# Altium PCB V_1.PcbDoc
Units mm, origin at the board's own origin, x right, y up, seen from the top; angles counter-clockwise.
Board outline 152.4 x 101.6 mm, 2 copper layers (Top Layer, Bottom Layer); 6 components, 9 nets, 74 pads, 13 vias.
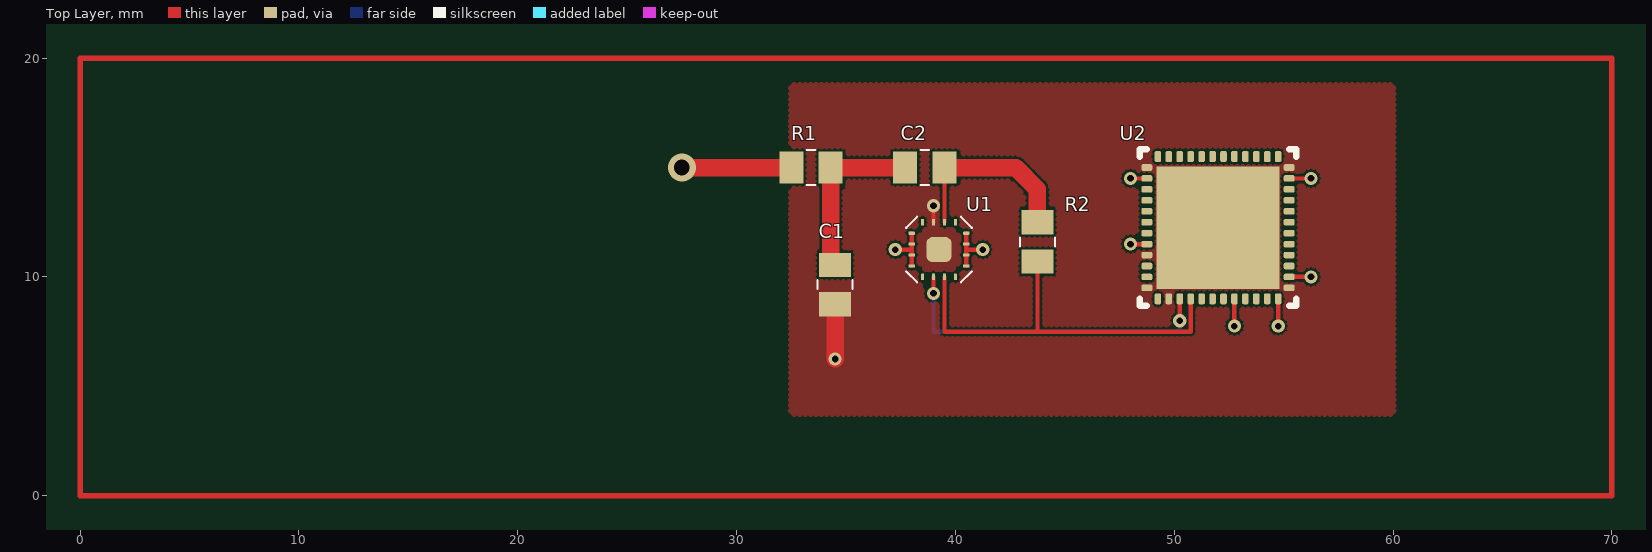
[diagram p0: Top Layer view]
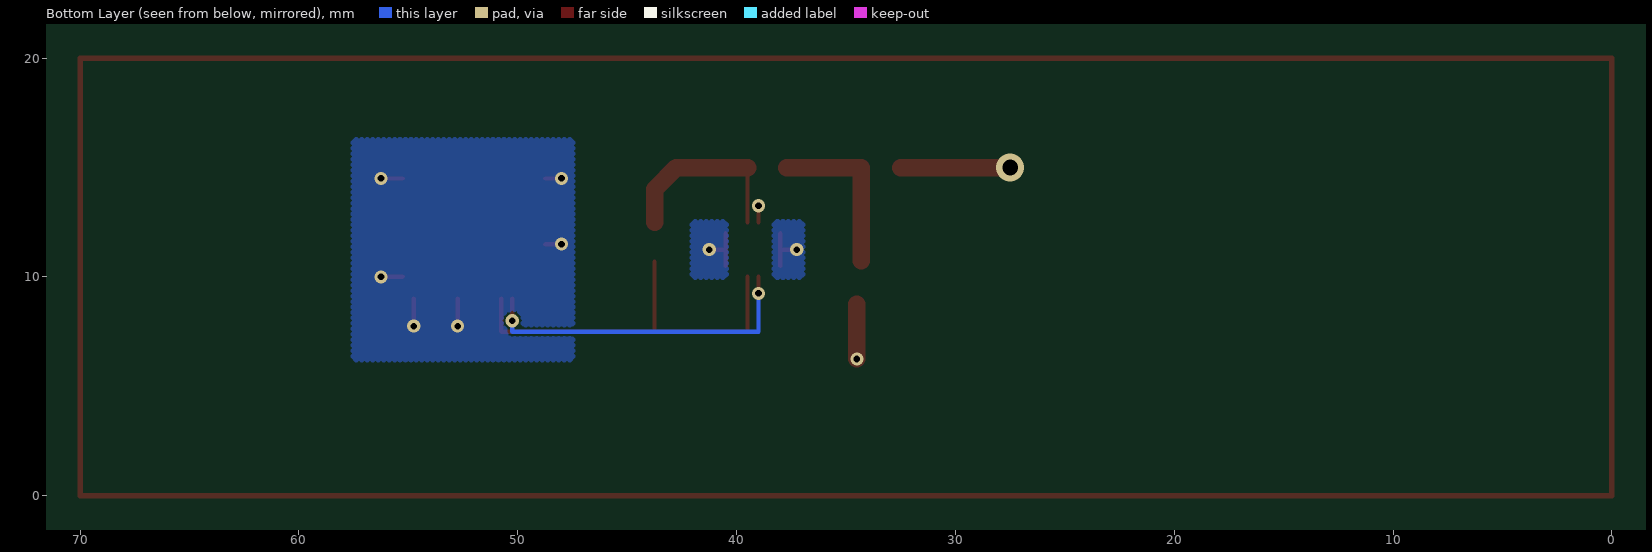
[diagram p1: Bottom Layer view, seen from below]

## Layer stack, top to bottom
Top Layer: signal copper 0.0356
Dielectric: dielectric 0.32, FR-4, Dk 4.8
Bottom Layer: signal copper 0.0356

## Board outline
-13.97,-53.975 138.43,-53.975 138.43,47.625 -13.97,47.625

## Design rules (kind name [scope] priority, off if disabled: settings)
Clearance [All] p1: gap=0.1
HoleToHoleClearance [All] p1: gap=0.2 allowstackedmicrovias=TRUE
MinimumSolderMaskSliver [All] p1: minsoldermaskwidth=0.05
PlaneClearance [All] p1: clearance=0.1
PlaneConnect [All] p1: planeconnectstyle=Direct reliefexpansion=0.508 reliefentries=4 reliefconductorwidth=0.254 reliefairgap=0.254
PolygonConnect [All] p1: connectstyle=Direct reliefconductorwidth=0.254 reliefentries=4 polygonreliefangle="90 Angle" airgapwidth=0.254
RoutingVias [All] p1: holewidth=0.3 width=0.6 viastyle="Through Hole" minholewidth=0.1 minwidth=0.1 maxholewidth=0.711 maxwidth=1.27
SilkToSilkClearance [All] p1: silktosilkclearance=0.2
SilkscreenOverComponentPads [All] p1: minsilkscreentomaskgap=0.1
SolderMaskExpansion [All] p1: expansion=0.05
Width [All] p1: maxlimit=1 minlimit=0.1 preferedwidth=0.5
22 further rules are at their usual default settings.

## Components (designator, comment, footprint, x,y, rotation, side; value= is the part's Value field where it differs from the comment)
C1 "2p2" CAP0805 34.5,8.75 r90 top
C2 "2p2" CAP0805 39.5,15 r180 top
R1 "6K8" RES0805 32.5,15 r0 top
R2 "2K2" RES0805 43.75,12.5 r270 top
U1 "ADA4932" ADA4932 40,12.5 r270 top
U2 "ADS61B" ADS61B49 48.75,15 r0 top

## Footprints (in the part's own frame and the unit in brackets; to place one, negate y for a bottom-side part, rotate by r counter-clockwise, add the part's x,y. Pads: shape width x height; smd on the part's side, far side on the other; paste and mask are expansions set on the pad)
ADA4932 [mm]
  rrect50% 0.3x0.15 smd: 1(0,0) 2(0,-0.5) 3(0,-1) 4(0,-1.5) 9(2.5,-1.5) 10(2.5,-1) 11(2.5,-0.5) 12(2.5,0)
  rrect50% 0.15x0.3 smd: 5(0.5,-2) 6(1,-2) 7(1.5,-2) 8(2,-2) 13(2,0.5) 14(1.5,0.5) 15(1,0.5) 16(0.5,0.5)
  rrect50% 1.15x1.15 smd: 17(1.25,-0.75)
  silkscreen extent -0.25,-2.25 2.75,0.75
ADS61B49 [mm]
  rrect50% 0.5x0.3 smd: 1(0,0) 2(0,-0.5) 3(0,-1) 4(0,-1.5) 5(0,-2) 6(0,-2.5) 7(0,-3) 8(0,-3.5) 9(0,-4) 10(0,-4.5) 11(0,-5) 12(0,-5.5) 25(6.5,-5.5) 26(6.5,-5) 27(6.5,-4.5) 28(6.5,-4) 29(6.5,-3.5) 30(6.5,-3) 31(6.5,-2.5) 32(6.5,-2) 33(6.5,-1.5) 34(6.5,-1) 35(6.5,-0.5) 36(6.5,0)
  rrect50% 0.3x0.5 smd: 13(0.5,-6) 14(1,-6) 15(1.5,-6) 16(2,-6) 17(2.5,-6) 18(3,-6) 19(3.5,-6) 20(4,-6) 21(4.5,-6) 22(5,-6) 23(5.5,-6) 24(6,-6) 37(6,0.5) 38(5.5,0.5) 39(5,0.5) 40(4.5,0.5) 41(4,0.5) 42(3.5,0.5) 43(3,0.5) 44(2.5,0.5) 45(2,0.5) 46(1.5,0.5) 47(1,0.5) 48(0.5,0.5)
  rect 5.6x5.6 smd: 49(3.25,-2.75)
  silkscreen extent -0.32,-6.32 6.83,0.82
CAP0805 [mm]
  rect 1.1x1.45 smd: 1(0,0) 2(1.8,0)
  silkscreen extent 0.7,-0.8 1.1,0.8
RES0805 [mm]
  rect 1.1x1.45 smd: 1(0,0) 2(1.8,0)
  silkscreen extent 0.7,-0.8 1.1,0.8

## Part data
C1 C2: library part Cap
R1 R2: library part Res
U2: library part ADS61B49

## Via types
v1: diameter 0.6, hole 0.3, Top Layer to Bottom Layer, 12 vias
v2: diameter 1.27, hole 0.711, Top Layer to Bottom Layer, 1 vias

## Nets (pads, with @x,y where several pads share a name; then routed paths per layer and width w, separated by ;. In a path a pad name is that pad's centre, name@x,y a point inside that pad or via, vN(x,y) a via of type N, cw(c..) or ccw(c..) an arc to the next point about the centre after c; other vN are vias at no path point)
3.3V: U2.2 U2.8 U2.20 U2.24 U2.26 U2.35 | length 6
  Top Layer w0.2: v1(48,11.5) U2.8 ; v1(48,14.5) U2.2 ; v1(52.75,7.75) U2.20 ; v1(54.75,7.75) U2.24 ; U2.26 v1(56.25,10) ; U2.35 v1(56.25,14.5)
+5V: U1.5 U1.6 U1.7 U1.8 | length 2.2
  Top Layer w0.2: v1(37.25,11.25) 38,11.25 ; U1.8 U1.7 38,11.25 ; U1.5 U1.6 38,11.25
-5V: U1.13 U1.14 U1.15 U1.16 | length 2.2
  Top Layer w0.2: U1.13 U1.14 40.5,11.25 ; U1.16 U1.15 40.5,11.25 ; v1(41.25,11.25) 40.5,11.25
GND: C1.1 U1.3 U1.17 U2.1 U2.9 U2.12 U2.14 U2.25 U2.36 U2.49 | length 3.2
  Top Layer w0.2: U1.3 v1(39,13.25)
  Top Layer w0.8: v1(34.5,6.25) C1.1
NetC1_2: C1.2 C2.2 R1.2 | length 7.6
  Top Layer w0.8: C1.2@34.3,10.75 R1.2 C2.2
NetC2_1: C2.1 R2.1 U1.2 | length 8.7
  Top Layer w0.2: U1.2 C2.1
  Top Layer w0.8: C2.1 42.75,15 43.75,14 R2.1
NetR1_1: R1.1 | length 5
  Top Layer w0.8: v2(27.5,15) R1.1
NetR2_2: R2.2 U1.11 U2.16 | length 18.4
  Top Layer w0.2: U1.11 39.5,7.5 50.75,7.5 U2.16 ; 43.75,7.5 R2.2
NetU1_10: U1.10 U2.15 | length 15.2
  Top Layer w0.2: v1(39,9.25) U1.10 ; v1(50.25,8) U2.15
  Bottom Layer w0.2: v1(39,9.25) 39,7.5 50.25,7.5 v1(50.25,8)
pads on no net: U1.1 U1.4 U1.9 U1.12 U2.3 U2.4 U2.5 U2.6 U2.7 U2.10 U2.11 U2.13 U2.17 U2.18 U2.19 U2.21 U2.22 U2.23 U2.27 U2.28 U2.29 U2.30 U2.31 U2.32 U2.33 U2.34 U2.37 U2.38 U2.39 U2.40 U2.41 U2.42 U2.43 U2.44 U2.45 U2.46 U2.47 U2.48
copper on no net: | length 180
  Top Layer w0.254: 0,0 70,0 70,20 0,20 0,0

## Polygon pours and split planes (outlines as drawn)
GND on Top Layer "Power2-No Net" (hatched 90Degree grid 0.25 track 0.3, pour order 8): 32.5,18.75 32.5,3.75 60,3.75 60,18.75
-5V on Bottom Layer "Power2-No Net" (hatched 90Degree grid 0.25 track 0.3, pour order 12): 40.5,12.5 40.5,10 42,10 42,12.5
+5V on Bottom Layer "Power2-No Net" (hatched 90Degree grid 0.25 track 0.3, pour order 10): 37,12.5 38.25,12.5 38.25,10 37,10
3.3V on Bottom Layer "Power2-No Net" (hatched 90Degree grid 0.25 track 0.3, pour order 6): 47.5,16.25 47.5,6.25 57.5,6.25 57.5,16.25